# Altium PCB PCB1.PcbDoc
Units mm, origin at the board's own origin, x right, y up, seen from the top; angles counter-clockwise.
Board outline 56.48 x 41.95 mm, 2 copper layers (Top Layer, Bottom Layer); 25 components, 15 nets, 60 pads, 0 vias.
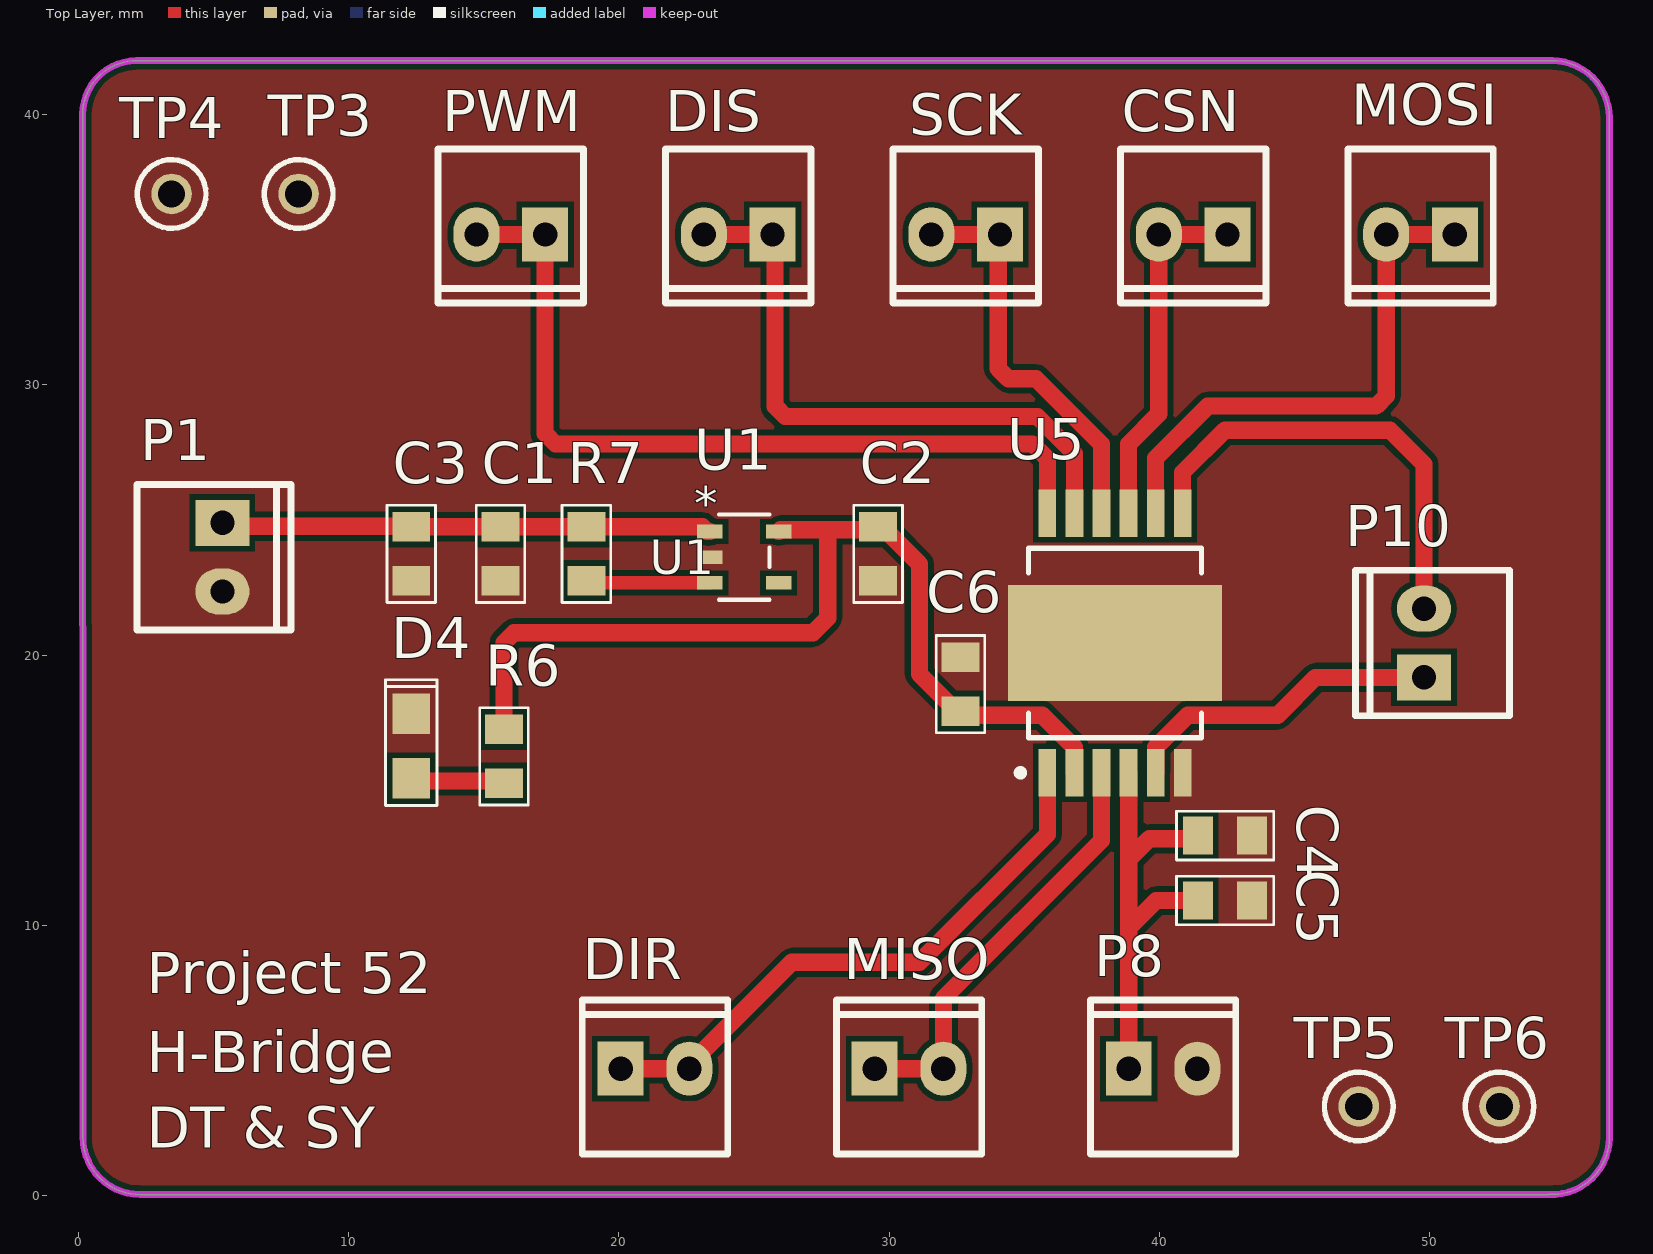
[diagram p0: Top Layer view]
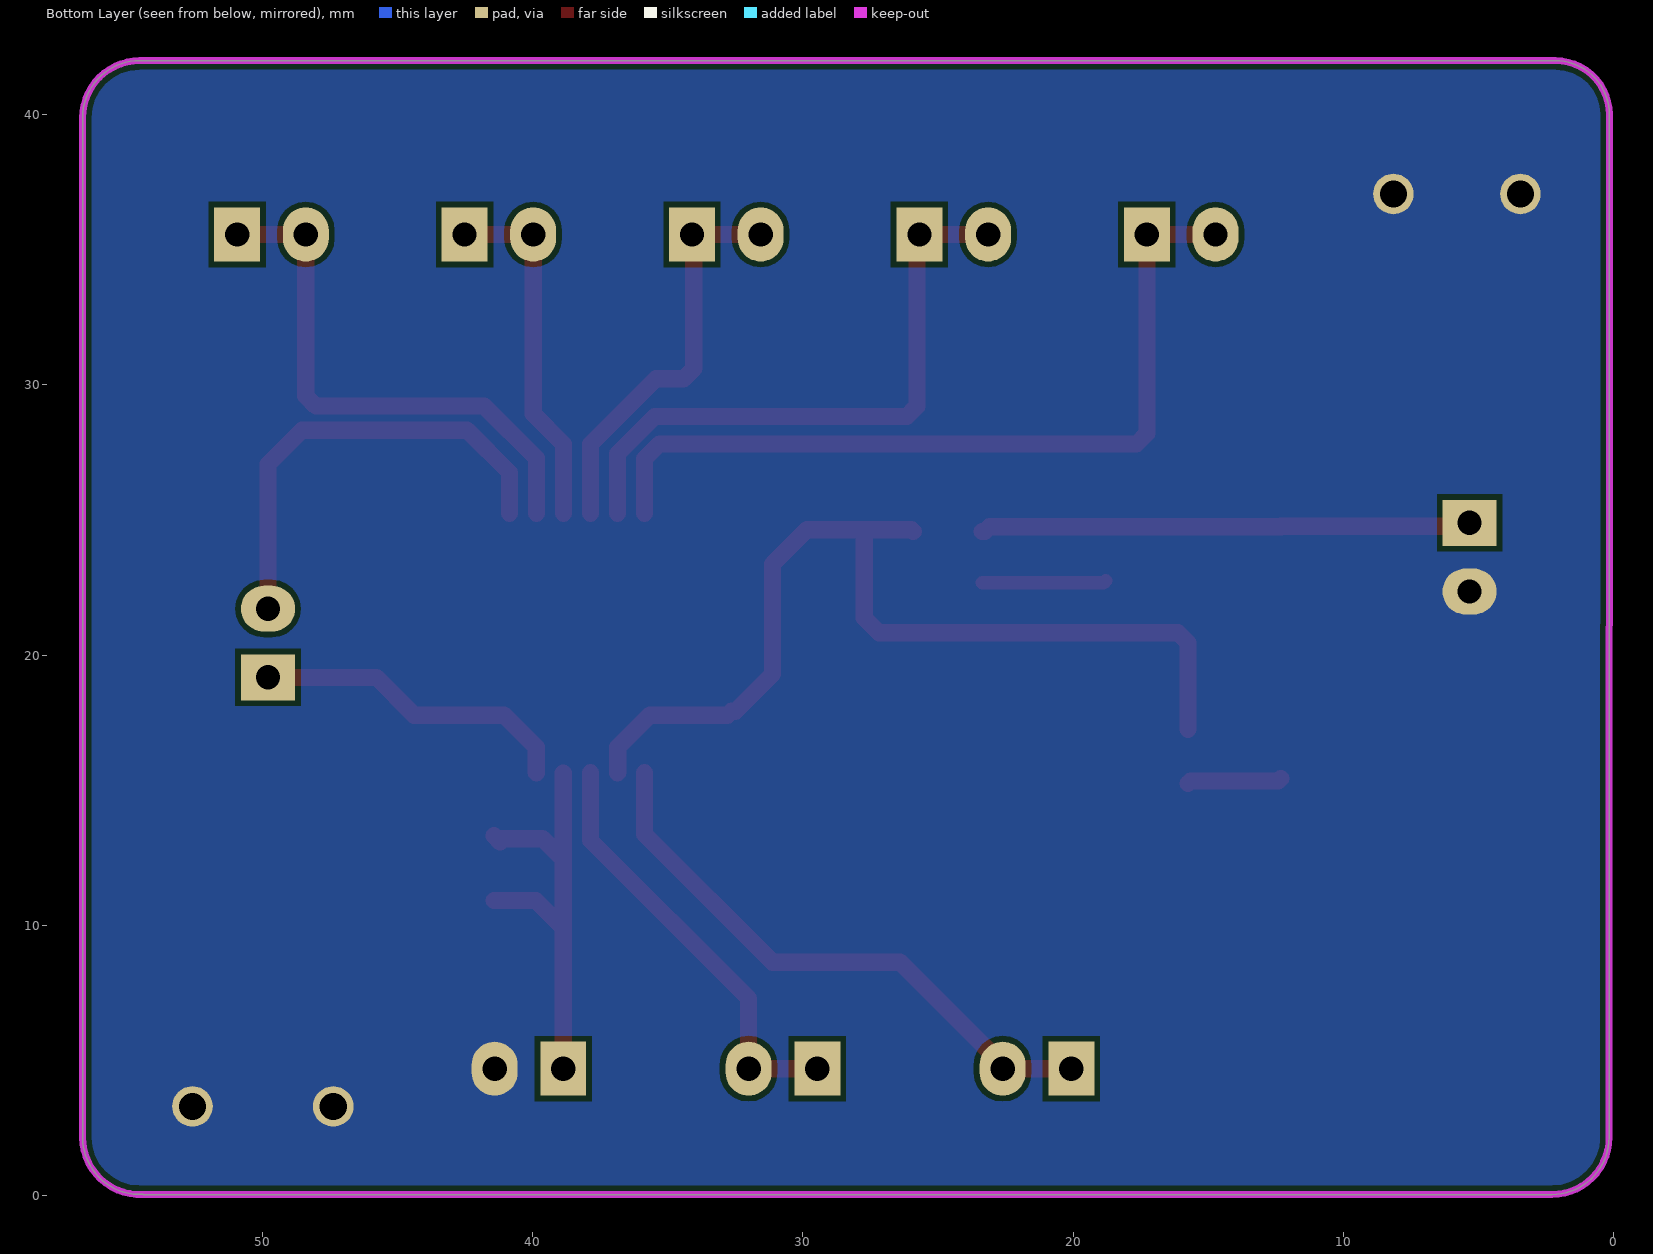
[diagram p1: Bottom Layer view, seen from below]
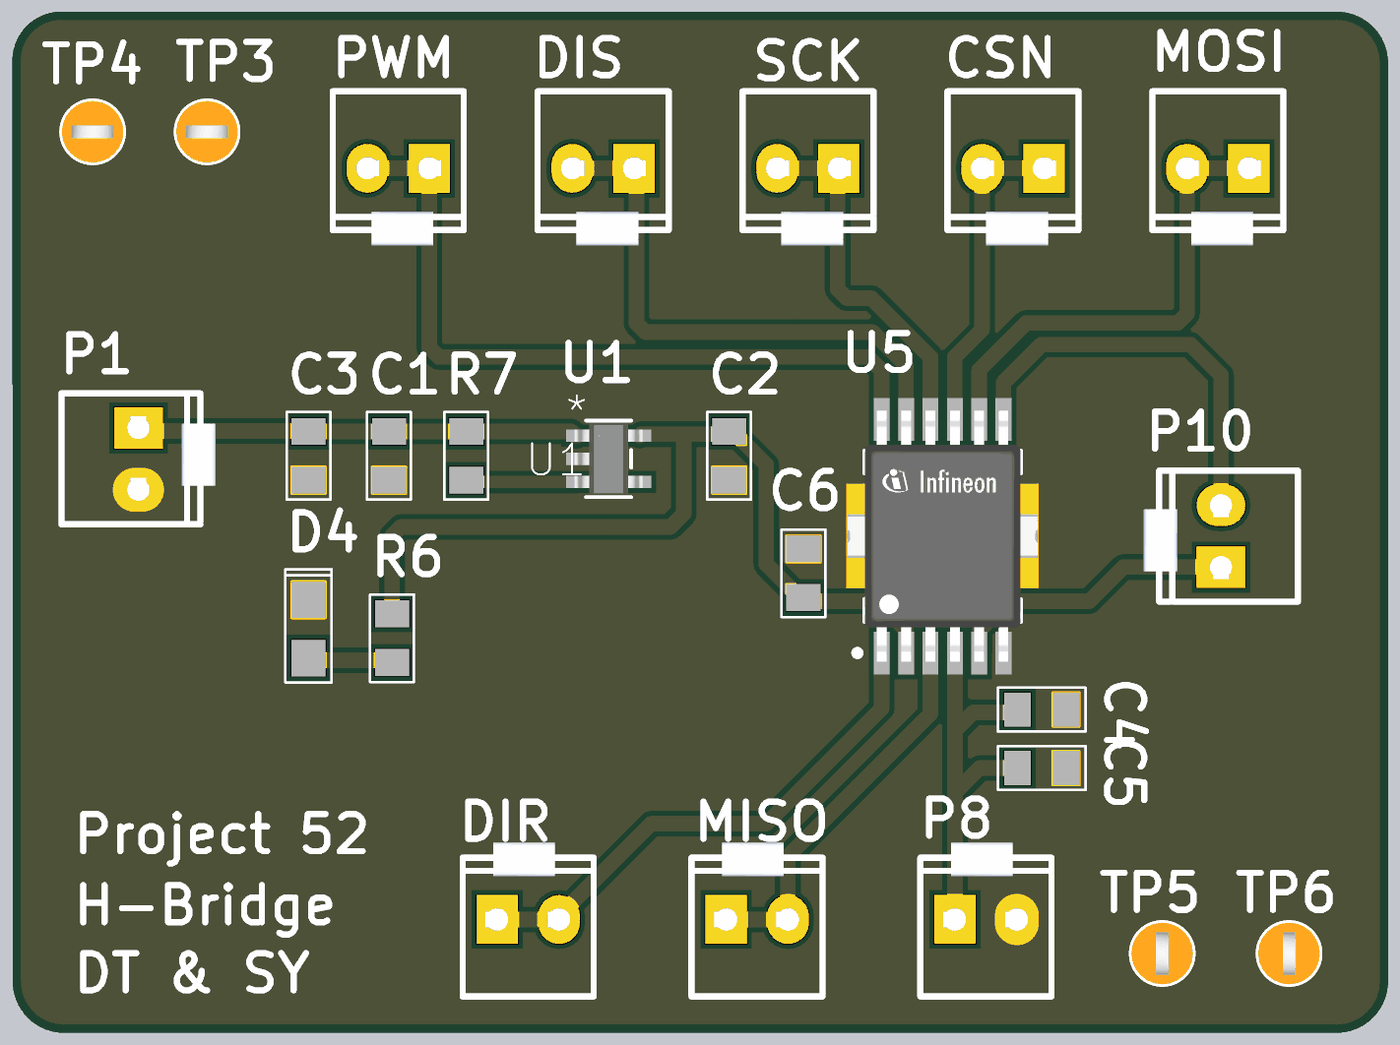
[diagram p2: 3D render of the assembled board from above, using the file's embedded part models]

## Layer stack, top to bottom
Top Solder: solder mask 0.0102, Solder Resist, Dk 3.5
Top Layer: signal copper 0.0356
Dielectric 1: dielectric 0.32, FR-4, Dk 4.8
Bottom Layer: signal copper 0.0356
Bottom Solder: solder mask 0.0102, Solder Resist, Dk 3.5

## Board outline
0.172,2.159 0.162,39.995 cw(c2.159,39.995) 2.159,41.992 54.528,41.992 cw(c54.528,39.878) 56.642,39.878 56.642,2.159 cw(c54.528,2.159) 54.396,0.049 54.396,0.045 2.286,0.045 cw(c2.286,2.159)

## Design rules (kind name [scope] priority, off if disabled: settings)
BoardOutlineClearance [All] p1: gap=0.2 ignorepadtopadclearanceinfootprint=FALSE
Clearance [All] p1: gap=0.203 ignorepadtopadclearanceinfootprint=TRUE except(0.254: Arc-Hole Track-Hole SMDPad-Hole THPad-Hole Via-Hole Fill-Hole Poly-Hole Region-Hole Text-Hole)
ComponentClearance [All] p1: gap=0.127 collisioncheckmode=3 verticalgap=0.127 showdistances=TRUE
DiffPairsRouting [All] p1: maxlimit=0.381 minlimit=0.203 mostfreqgap=0.203 toplayer_minwidth=0.203 toplayer_maxwidth=25.4 toplayer_prefwidth=0.203 bottomlayer_minwidth=0.203 bottomlayer_maxwidth=25.4 bottomlayer_prefwidth=0.203 maxuncoupledlength=12.7
Height [All] p1: minheight=0 maxheight=1816.048 prefheight=12.7
HoleSize [All] p1: absolutevalues=TRUE maxlimit=6.3 minlimit=0.3 maxpercent=80.000 minpercent=20.000
HoleToHoleClearance [All] p1: gap=0.254 allowstackedmicrovias=FALSE
MinimumAnnularRing [All] p1: minimumring=0.152
MinimumSolderMaskSliver [All] p1: minsoldermaskwidth=0.152
PlaneClearance [All] p1: clearance=0.203
PlaneConnect PlaneConnectPowerPads [InPadClass('PowerPads')] p1: planeconnectstyle=Direct reliefexpansion=0.508 reliefentries=4 reliefconductorwidth=0.254 reliefairgap=0.254
PlaneConnect [All] p2: pad.planeconnectstyle=Relief pad.reliefexpansion=0.3 pad.reliefentries=4 pad.reliefconductorwidth=0.203 pad.reliefairgap=0.203 via.planeconnectstyle=Direct via.reliefexpansion=0.3 via.reliefentries=4 via.reliefconductorwidth=0.127 via.reliefairgap=0.127
PolygonConnect PolygonConnectPowerPads [All vs (InPadClass('PowerPads'))] p1: connectstyle=Direct reliefconductorwidth=0.254 reliefentries=4 polygonreliefangle="90 Angle" airgapwidth=0.254
PolygonConnect [All] p2: connectstyle=Direct reliefconductorwidth=0.203 reliefentries=4 polygonreliefangle="90 Angle" airgapwidth=0.203
RoutingVias [All] p1: holewidth=0.3 width=0.6 viastyle="Through Hole" minholewidth=0.3 minwidth=0.6 maxholewidth=0.6 maxwidth=6.6
SilkToSilkClearance [All] p1: silktosilkclearance=0.127
SilkToSolderMaskClearance [IsPad] p1: minsilkscreentomaskgap=0.127 clearancetoexposedcopper=TRUE
SolderMaskExpansion [All] p1: expansion=0.051 istentingtop=FALSE
UnRoutedNet [All] p1: checkbadconnections=TRUE
Width Power_20mil [All] p1: maxlimit=25.4 minlimit=0.508 preferedwidth=0.508 minimp=50.000000 maximp=50.000000 favimp=50.000000
Width Power_12mil [All] p2: maxlimit=25.4 minlimit=0.305 preferedwidth=0.305 minimp=50.000000 maximp=50.000000 favimp=50.000000
Width Width_10mil [All] p3: maxlimit=25.4 minlimit=0.254 preferedwidth=0.254 minimp=50.000000 maximp=50.000000 favimp=50.000000
Width Width_8mil [All] p4: maxlimit=25.4 minlimit=0.203 preferedwidth=0.203 minimp=50.000000 maximp=50.000000 favimp=50.000000
19 further rules are at their usual default settings.

## Components (designator, comment, footprint, x,y, rotation, side; value= is the part's Value field where it differs from the comment)
C1 "*" "0805 CAP" 15.621,23.749 r270 top
C2 "*" "0805 CAP" 29.591,23.749 r270 top
C3 "*" "0805 CAP" 12.319,23.749 r270 top
C4 "*" "0805 CAP" 42.425,13.321 r0 top
C5 "*" "0805 CAP" 42.425,10.922 r0 top
C6 "*" "0805 CAP" 32.639,18.923 r90 top
CSN "2 Way" ECE-600102STTH 42.513,35.56 r270 top
D4 "LTST-C170KGKT" "0805 LED" 12.319,16.637 r90 top
DIR "2 Way" ECE-600102STTH 20.066,4.699 r90 top
DIS "2 Way" ECE-600102STTH 25.686,35.56 r270 top
MISO "2 Way" ECE-600102STTH 29.464,4.699 r90 top
MOSI "2 Way" ECE-600102STTH 50.927,35.56 r270 top
P1 "2 Way" ECE-600102STTH 5.334,24.892 r0 top
P8 "2 Way" ECE-600102STTH 38.862,4.699 r90 top
P10 "2 Way" ECE-600102STTH 49.784,19.177 r180 top
PWM "2 Way" ECE-600102STTH 17.272,35.56 r270 top
R6 "*" "0805 RES" 15.748,16.256 r270 top
R7 "*" "0805 RES" 18.796,23.749 r90 top
SCK "2 Way" ECE-600102STTH 34.099,35.56 r270 top
TP3 "5003" TP_TH 8.153,37.059 r180 top
TP4 "5003" TP_TH 3.454,37.059 r180 top
TP5 "5003" TP_TH 47.371,3.302 r90 top
TP6 "5003" TP_TH 52.578,3.302 r90 top
U1 "NCP161ASN330T1G" SOT23_527AH_ONS 24.638,23.622 r0 top
U5 "IFX9201SG" SOP100P1030X260-13N 38.354,20.447 r90 top

## Footprints (in the part's own frame and the unit in brackets; to place one, negate y for a bottom-side part, rotate by r counter-clockwise, add the part's x,y. Pads: shape width x height; smd on the part's side, far side on the other; paste and mask are expansions set on the pad)
"0805 CAP" [mm] "http://www.digikey.co.nz/Web%20Export/Supplier%20Content/Vishay_8026/PDF/VishayBeyschlag_SolderPad.pdf?redirected=1 with dimension G modified by +0.25mm"
  rect 1.1x1.4 smd: 1(-1,0) 2(1,0)
  silkscreen extent -1.8,-0.9 1.8,0.9, body extent -1.04,-0.66 1.04,0.66, height 0.61
"0805 LED" [mm] "RED AS AlGaAs SMD LED, Body; 2mm x 1.25 mm (LxW)"
  rect 1.5x1.4 smd: 1(-1.2,0) 2(1.2,0)
  silkscreen extent -2.2,-0.95 2.45,0.95, body extent -1,-0.63 1,0.63, height 1.1
"0805 RES" [mm] "http://www.digikey.co.nz/Web%20Export/Supplier%20Content/Vishay_8026/PDF/VishayBeyschlag_SolderPad.pdf?redirected=1 with dimension G modified by +0.25mm"
  rect 1.1x1.4 smd: 1(-1,0) 2(1,0)
  silkscreen extent -1.8,-0.9 1.8,0.9, body extent -1.04,-0.66 1.04,0.66, height 0.61
ECE-600102STTH [mm] "Polarised Header 2 way"
  rect 2x1.7 hole 0.9: 1(0,0)
  oval 2x1.7 hole 0.9: 2(0,-2.54)
  silkscreen extent -3.16,-3.96 2.54,1.42, body extent -3.3,-3.64 3.17,1.44, height 7.39
SOP100P1030X260-13N [mm] "SOP,1.00mm pitch;12 pin,7.50mm W X 6.40mm L X 2.60mm H body (w/thermal tab)"
  rect 1.75x0.65 smd paste+0 mask+0: 1(-4.8,2.5) 2(-4.8,1.5) 3(-4.8,0.5) 4(-4.8,-0.5) 5(-4.8,-1.5) 6(-4.8,-2.5) 7(4.8,-2.5) 8(4.8,-1.5) 9(4.8,-0.5) 10(4.8,0.5) 11(4.8,1.5) 12(4.8,2.5)
  rect 4.3x7.9 smd paste-3 mask+0: 13(0,0)
  silkscreen extent -4.92,-3.2 3.5,3.62, body extent -5.15,-3.9 5.15,3.9, height 2.61
SOT23_527AH_ONS [mil]
  rect 37.28x20 smd paste+0 mask+0: 1(-50.14,37.4) 2(-50.14,0) 3(-50.14,-37.4) 4(50.14,-37.4) 5(50.14,37.4)
  silkscreen extent -36,-62 36,62, body extent -55,-57 55,57, height 57
TP_TH [mm] "Test Point, Through Hole, Dia 2.54mm"
  round 1.5 hole 1: 1(0,0)
  silkscreen extent -1.27,-1.27 1.27,1.27, body extent -1.27,-1.27 1.27,1.27, height 4.57

## Part data
C1 C2 C3 C4 C5 C6: library part CerCap_SMT_0805, "SMT ceramic capacitor 0805 size"
CSN DIR DIS MISO MOSI P1 P8 P10 PWM SCK: library part CON000001, "HEADER POLARISED 2WAY TH", Manufactuer=GTK, Manufacturer-PN=600102ST, Size/Package="2.54 Radial", Assembly Method="Through hole", Category=Connector, Component Type=NA, Datasheet Link=http://share.engineering.auckland.ac.nz/ece/ts/Student%20Documents/polarised_connectors.pdf, Item Type=Item, Path="ece/ts/Lists/Stock Inventory", Status=Active, Supplier1=Elecon, Supplier1-PN=YY3N02, Supplier2="Active Components", Supplier2-PN=600102ST, UoA Stock#=CON000001
D4: library part LED_SMT_0805, "SMT LED 0805 size", Color=Green, Current - Test=20mA, Lens Color=Colorless, Manufacturer="Lite-On Inc.", Millicandela Rating=35mcd, Package / Case="0805 (2012 Metric)", Supplier Part Number 1=160-1414-1-ND, Voltage - Forward (Vf) (Typ)=2V, Category=Optoelectronics, ComponentLink1Description=http://optoelectronics.liteon.com/upload/download/DS22-2000-073/LTST-C170KGKT.pdf, ComponentLink1URL=http://optoelectronics.liteon.com/upload/download/DS22-2000-073/LTST-C170KGKT.pdf, Features=-, Height (Max)=1.10mm, Lens Style/Size="Rectangle with Flat Top, 1.40mm x 1.25mm", Lens Transparency=Clear, Manufacturer Part Number=LTST-C170KGKT, Mounting Type="Surface Mount", Packaging="Cut Tape (CT)", Part Status=Active, Pricing 1="1=0.62, 10=0.459, 25=0.338, 100=0.2415, 250=0.16416, 500=0.14486, 1000=0.11347 (NZD)", RoHS="RoHS Compliant", Size / Dimension="2.00mm L x 1.25mm W", Stock 1=503069, Supplier 1=Digi-Key, Viewing Angle=130°, Wavelength - Dominant=571nm, Wavelength - Peak=574nm
R6 R7: library part Res_SMT_0805, "0805 resistor", ComponentLink1Description=https://nz.mouser.com/datasheet/2/315/AOA0000C304-1149620.pdf, LatestRevisionDate=17-Jul-2002, LatestRevisionNote="Re-released for DXP Platform.", PackageReference=AXIAL-0.4, Published=8-Jun-2000, Publisher="Altium Limited"
TP3 TP4 TP5 TP6: library part TestPoint, "Test Point, Orange, 1-Pin THD, RoHS", Forward Current="3 A", Forward Voltage="1.08 V", Max Operating Temperature="150 degC", Max Surge Current="80 A", Min Operating Temperature="-65 degC", Package Quantity=500, Peak Reverse Current="600 uA", ComponentLink1Description="Manufacturer URL", ComponentLink1URL=http://www.keyelco.com/, ComponentLink2Description=Datasheet, ComponentLink2URL=http://keyelco.com/userAssets/file/M65p56.pdf, DatasheetVersion=Jun-15, Diameter="5.3 mm", Height="0.25 inch", Length="9.5 mm", Mount="Through Hole", PackageDescription="1-Pin Through Hole Device, Dia 2.54 mm", PackageReference=5003, Packaging=Bulk, Pins=2, Radiation Hardening=No, REACH SVHC="No SVHC", RoHSCompliant=true, Weight="0.01 lb", Width="0.25 inch"
U1: "Description", Manufacturer_Name=onsemi, Copyright="Copyright (C) 2026 Ultra Librarian. All rights reserved.", Manufacturer_Part_Number=NCP161ASN330T1G, RefDes=RefDes, Type=Type
U5: "6 A H-Bridge with SPI", Manufacturer="Infineon Technologies", ManufacturerPartNumber=IFX9201SG, PackageReference=PG-DSO-12-17

## Nets (pads, with @x,y where several pads share a name; then routed paths per layer and width w, separated by ;. In a path a pad name is that pad's centre, name@x,y a point inside that pad or via, vN(x,y) a via of type N, cw(c..) or ccw(c..) an arc to the next point about the centre after c; other vN are vias at no path point)
3V3: C2.1 C6.1 R6.1 U1.5 U5.2 | length 36.4
  Top Layer w0.635: R6.1 15.748,20.456 16.12,20.828 27.178,20.828 27.726,21.376 27.726,24.636 ; U1.5 25.975,24.636 27.726,24.636 ; U5.2 36.846,15.655 36.846,16.591 35.661,17.776 32.786,17.776 C6.1 32.489,17.923 31.115,19.297 31.115,23.375 29.854,24.636 27.726,24.636
5V: C1.1 C3.1 P1.1 R7.2 U1.1 | length 18.2
  Top Layer w0.635: P1.1 5.461,24.765 12.303,24.765 C3.1 C1.1 R7.2 23.095,24.749 23.272,24.572 U1.1
CSN: CSN.1 CSN.2 U5.9 | length 13.3
  Top Layer w0.635: U5.9 38.854,27.805 39.973,28.924 CSN.2 CSN.1
DIR: DIR.1 DIR.2 U5.1 | length 21.7
  Top Layer w0.635: DIR.1 DIR.2 22.606,4.849 26.393,8.636 31.115,8.636 35.854,13.375 U5.1
DIS: DIS.1 DIS.2 U5.11 | length 22.9
  Top Layer w0.635: DIS.2 DIS.1 25.781,35.465 25.781,29.201 26.153,28.829 35.475,28.829 36.854,27.45 U5.11
GND: C1.2 C2.2 C3.2 C4.2 C5.2 C6.2 D4.2 P1.2 P8.2 TP3.1 TP4.1 TP5.1 TP6.1 U1.2 U5.6 U5.13
NetD4_1: D4.1 R6.2 | length 3.5
  Top Layer w0.635: D4.1 12.41,15.346 15.657,15.346 R6.2
NetR7_1: R7.1 U1.3 | length 4.6
  Top Layer w0.508: R7.1 18.873,22.672 U1.3
PELTIER_N: P10.2 U5.7 | length 17
  Top Layer w0.635: U5.7 40.854,26.757 42.418,28.321 48.523,28.321 49.784,27.06 P10.2
PELTIER_P: P10.1 U5.5 | length 11.9
  Top Layer w0.635: U5.5 39.862,15.655 39.862,16.591 41.047,17.776 44.374,17.776 45.775,19.177 P10.1
PWM: PWM.1 PWM.2 U5.12 | length 30.9
  Top Layer w0.635: PWM.2 PWM.1 17.272,28.194 17.653,27.813 35.306,27.813 35.854,27.265 U5.12
SPI1_MISO: MISO.1 MISO.2 U5.3 | length 15.9
  Top Layer w0.635: MISO.1 MISO.2 32.004,7.294 37.854,13.144 U5.3
SPI1_MOSI: MOSI.1 MOSI.2 U5.8 | length 20
  Top Layer w0.635: U5.8 39.854,27.281 41.783,29.21 48.015,29.21 48.387,29.582 MOSI.2 MOSI.1
SPI1_SCK: SCK.1 SCK.2 U5.10 | length 15.1
  Top Layer w0.635: SCK.2 SCK.1 34.036,35.496 34.036,30.598 34.408,30.226 35.433,30.226 37.854,27.805 U5.10
V_IN: C4.1 C5.1 P8.1 U5.4 | length 17.2
  Top Layer w0.635: P8.1@38.862,4.572 38.862,10.033 ; U5.4@38.861,15.639 38.861,14.889 38.862,12.573 ; C4.1@41.193,13.081 41.425,13.314 C4.1 41.312,13.208 39.624,13.208 38.989,12.573 38.862,12.573 ; C5.1 39.878,10.922 38.989,10.033 38.862,10.033 ; 38.862,10.033 38.862,12.573
pads on no net: U1.4

## Polygon pours and split planes (outlines as drawn)
GND on Bottom Layer "GND_L02_P000" (solid, pour order 0): -0.324,41.992 56.642,41.992 56.642,1.524 55.167,0.049 0.199,0.049
GND on Top Layer "GND_L01_P001" (solid, pour order 1): -0.767,41.992 56.642,41.992 56.642,1.651 55.036,0.045 -0.244,0.045

## Keep-outs
Keep-Out Layer:
  lines w0.254: 54.396,0.045 2.286,0.045 cw(c2.286,2.159) 0.172,2.159 0.162,39.995 cw(c2.159,39.995) 2.159,41.992 54.528,41.992 cw(c54.528,39.878) 56.642,39.878 56.642,2.159 cw(c54.528,2.159) 54.396,0.049

## Silkscreen, mask and mechanical layers (free items; w line width, h text height)
Top Overlay:
  text "Project 52" at 2.54,7.493 h1.52
  text "H-Bridge" at 2.54,4.572 h1.52
  text "DT & SY" at 2.54,1.778 h1.52

## Text inside footprints (layer, text, board x,y; h text height)
U1: Top Overlay "*" at 22.793,24.953 h1.27; Mechanical 13 "*" at 23.774,23.861 h1.27